# Altium PCB Jamali.PcbDoc
Units mm, origin at the board's own origin, x right, y up, seen from the top; angles counter-clockwise.
Board outline 152.4 x 101.6 mm, 2 copper layers (Top Layer, Bottom Layer); 45 components, 45 nets, 171 pads, 0 vias.
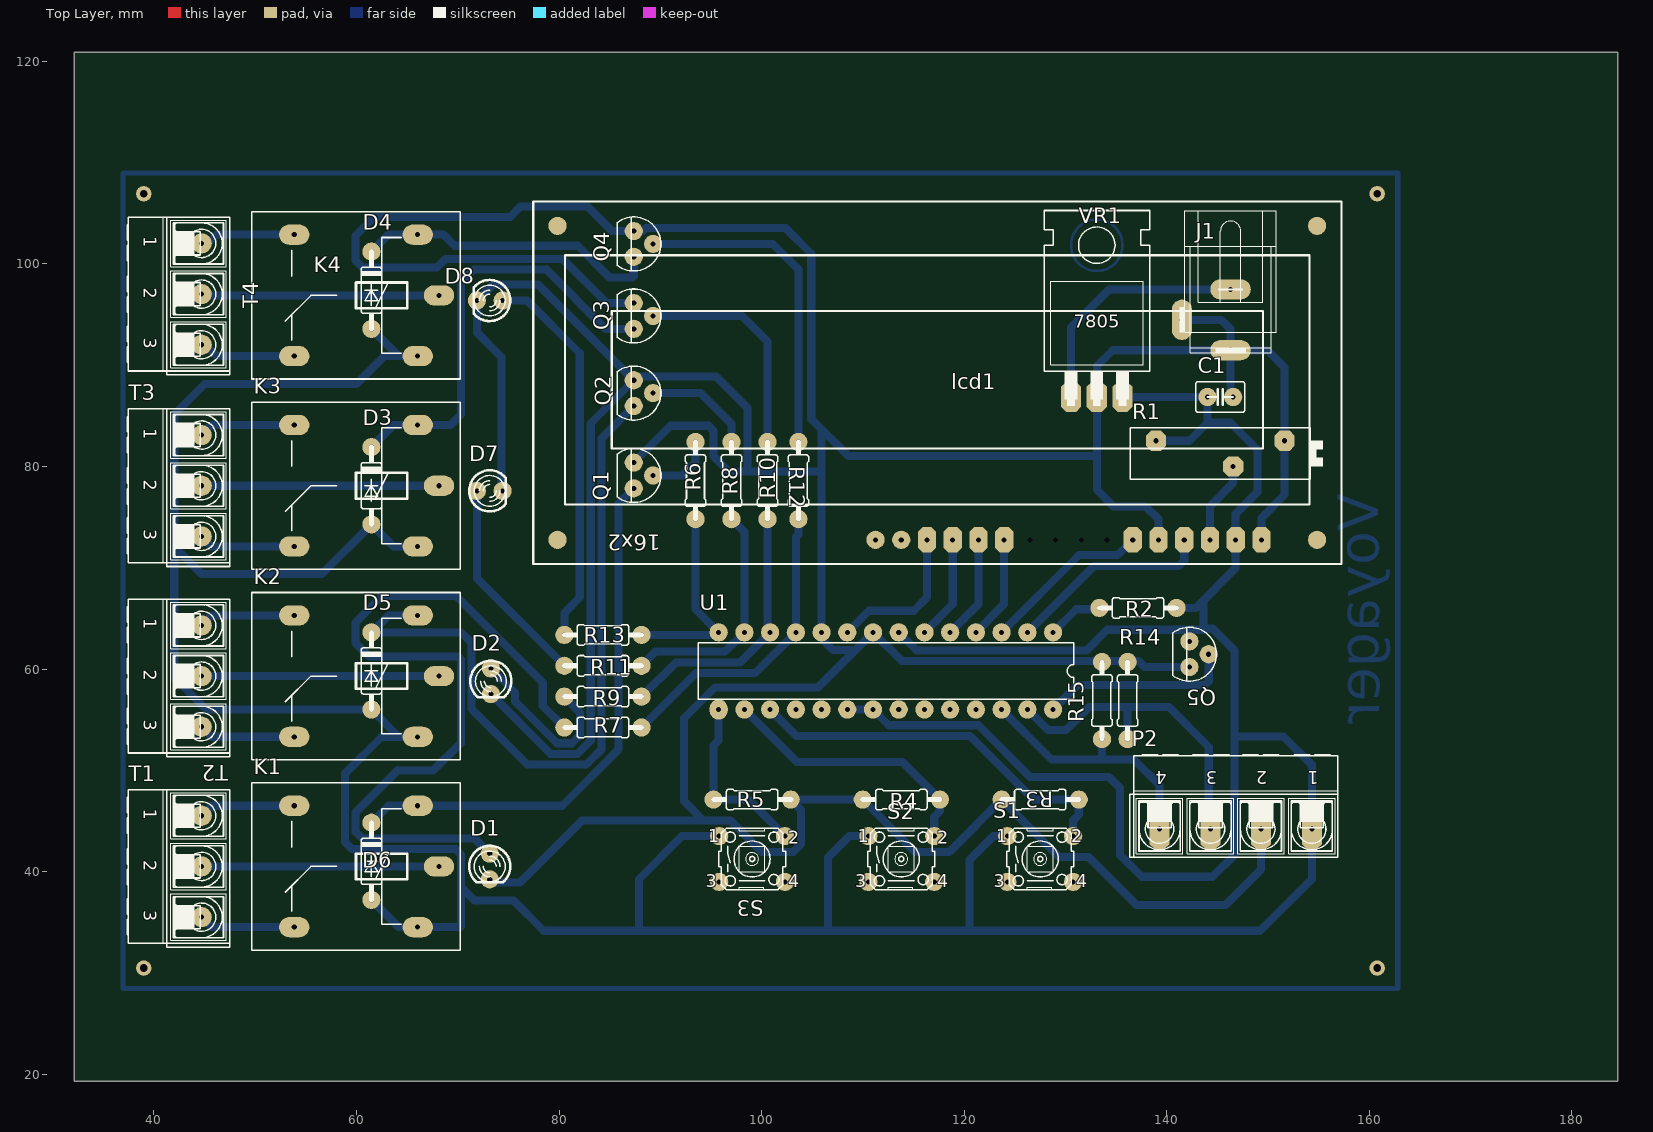
[diagram p0: Top Layer view]
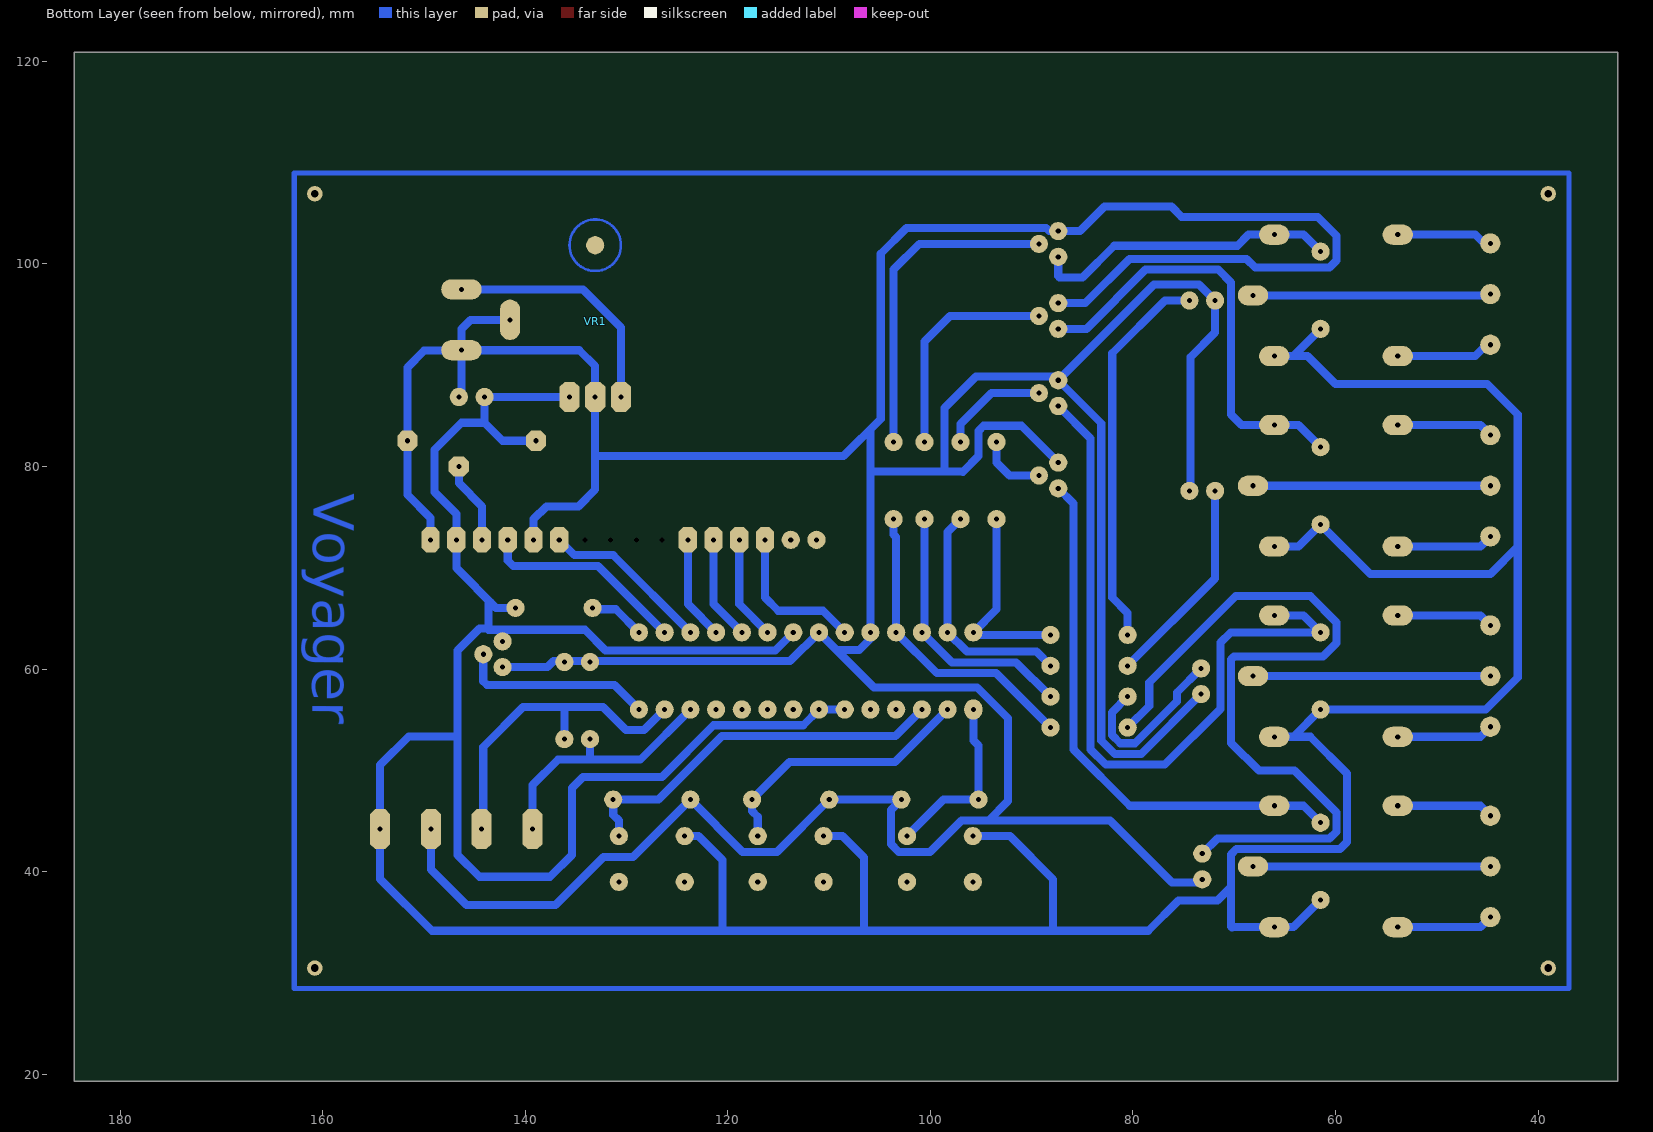
[diagram p1: Bottom Layer view, seen from below]

## Layer stack, top to bottom
Top Layer: signal copper 0.0356
Dielectric: dielectric 0.32, FR-4, Dk 4.8
Bottom Layer: signal copper 0.0356

## Board outline
32.131,19.304 184.531,19.304 184.531,120.904 32.131,120.904

## Design rules (kind name [scope] priority, off if disabled: settings)
Clearance [All] p1: gap=0.254
FabricationTestPointUsage TestPointUsage [All] p1: valid=0 allowmultiple=FALSE
FabricationTestpoint Testpoint [All] p1: side=3 testpointundercomponent=TRUE minsize=1.016 maxsize=2.54 preferedsize=1.524 minholesize=0 maxholesize=1.016 preferedholesize=0.813 testpointgrid=0.025 allowsidetop=TRUE allowsidebottom=TRUE usegrid=TRUE gridtolerance=0
PolygonConnect [All] p1: connectstyle=Relief reliefconductorwidth=0.254 reliefentries=4 polygonreliefangle="90 Angle"
RoutingLayers [All] p1: top layer_v5=FALSE bottom layer_v5=TRUE
RoutingVias [All] p1: holewidth=0.711 width=1.27 viastyle="Through Hole" minholewidth=0.711 minwidth=1.27 maxholewidth=0.711 maxwidth=1.27
SilkscreenOverComponentPads [All] p1: minsilkscreentomaskgap=0.254
SolderMaskExpansion [All] p1: expansion=0.102
Width [All] p1: maxlimit=0.8 minlimit=0.5 preferedwidth=0.8
24 further rules are at their usual default settings.

## Components (designator, comment, footprint, x,y, rotation, side; value= is the part's Value field where it differs from the comment)
C1 "Cap" C2.5-3 145.288,86.868 r0 top
D1 "LED0" LED3MM 73.152,40.513 r270 top
D2 "LED0" LED3MM 73.265,58.801 r270 top
D3 "Diode" DO35-7 61.468,78.105 r270 top
D4 "Diode" DO35-7 61.468,97.409 r270 top
D5 "Diode" DO35-7 61.468,59.817 r270 top
D6 "Diode" DO35-7 61.468,41.021 r270 top
D7 "LED0" LED3MM 73.152,77.597 r0 top
D8 "LED0" LED3MM 73.152,96.393 r180 top
J1 "" SPC4077 146.304,94.488 r270 top
K1 "Relay" ZF112 59.944,40.513 r180 top
K2 "Relay" ZF112 59.944,59.309 r180 top
K3 "Relay" ZF112 59.944,78.105 r180 top
K4 "Relay" ZF112 59.944,96.901 r180 top
lcd1 "LCD" TUXGR_16X2_R2 117.348,88.265 r180 top
P2 "Terminal 4" AK500/4-H 146.812,44.196 r180 top
Q1 "2N3904" TO92D 87.376,79.121 r270 top
Q2 "2N3904" TO92D 87.376,87.249 r270 top
Q3 "2N3904" TO92D 87.376,94.869 r270 top
Q4 "2N3904" TO92D 87.376,101.981 r270 top
Q5 "2N3904" TO92D 142.24,61.468 r270 top
R1 "" POT_2 145.288,81.28 r180 top
R2 "Res1" 0204/7 137.16,66.04 r0 top
R3 "Res2" 0204/7 127.508,47.117 r0 top
R4 "Res2" 0204/7 113.792,47.117 r0 top
R5 "Res2" 0204/7 99.06,47.117 r180 top
R6 "Res1" 0204/7 93.472,78.613 r90 top
R7 "Res1" 0204/7 84.328,54.229 r180 top
R8 "Res1" 0204/7 97.028,78.613 r90 top
R9 "Res1" 0204/7 84.328,57.277 r180 top
R10 "Res1" 0204/7 100.584,78.613 r90 top
R11 "Res1" 0204/7 84.328,60.325 r180 top
R12 "Res1" 0204/7 103.632,78.613 r90 top
R13 "Res1" 0204/7 84.328,63.373 r180 top
R14 "Res1" 0204/7 136.144,56.896 r270 top
R15 "Res1" 0204/7 133.604,56.896 r270 top
S1 "Button" B3F-10XX 127.508,41.25 r0 top
S2 "Button" B3F-10XX 113.792,41.25 r0 top
S3 "Button" B3F-10XX 99.06,41.25 r0 top
T1 "TERMINAL 3" AK500/3-H 44.704,40.513 r270 top
T2 "TERMINAL 3" AK500/3-H 44.704,59.309 r270 top
T3 "TERMINAL 3" AK500/3-H 44.704,78.105 r270 top
T4 "TERMINAL 3" AK500/3-H 44.704,97.028 r270 top
U1 "ATmega8-16PI" DIL28-3 112.268,59.817 r180 top
VR1 "7805_2" TO220H 133.096,97.028 r180 top

## Footprints (in the part's own frame and the unit in brackets; to place one, negate y for a bottom-side part, rotate by r counter-clockwise, add the part's x,y. Pads: shape width x height; smd on the part's side, far side on the other; paste and mask are expansions set on the pad)
0204/7 [mm]
  round 1.8 hole 0.5: 1(-3.81,0) 2(3.81,0)
  silkscreen extent -3.81,-1.02 3.81,1.02
AK500/3-H [mm]
  round 2 hole 0.5: 1(-5.004,0) 2(0,0) 3(5.004,0)
  silkscreen extent -7.59,-7.37 7.98,2.79
AK500/4-H [mm]
  oct 1.981x3.962 hole 0.5: 1(-7.518,0) 2(-2.489,0) 3(2.489,0) 4(7.518,0)
  silkscreen extent -10.08,-7.37 10.46,2.79
B3F-10XX [mm]
  round 1.8 hole 0.5: 1(-3.251,2.261) 2(3.251,2.261) 3(-3.251,-2.261) 4(3.251,-2.261)
  silkscreen extent -3.3,-3.05 3.3,3.05
C2.5-3 [mm]
  round 1.8 hole 0.5: 1(-1.27,0) 2(1.27,0)
  silkscreen extent -2.41,-1.52 2.41,1.52
DIL28-3 [mm]
  round 1.8 hole 0.5: 1(-16.51,-3.81) 2(-13.97,-3.81) 3(-11.43,-3.81) 4(-8.89,-3.81) 5(-6.35,-3.81) 6(-3.81,-3.81) 7(-1.27,-3.81) 8(1.27,-3.81) 9(3.81,-3.81) 10(6.35,-3.81) 11(8.89,-3.81) 12(11.43,-3.81) 13(13.97,-3.81) 14(16.51,-3.81) 16(13.97,3.81) 17(11.43,3.81) 18(8.89,3.81) 19(6.35,3.81) 20(3.81,3.81) 21(1.27,3.81) 22(-1.27,3.81) 23(-3.81,3.81) 24(-6.35,3.81) 25(-8.89,3.81) 26(-11.43,3.81) 27(-13.97,3.81) 28(-16.51,3.81)
  oval 1.8x2 hole 0.5: 15(16.51,3.81)
  silkscreen extent -18.54,-2.79 18.54,2.79
DO35-7 [mm]
  round 1.8 hole 0.5: 1(-3.81,0) 2(3.81,0)
  silkscreen extent -3.81,-1.02 3.81,1.02
LED3MM [mm]
  round 1.8 hole 0.5: 1(-1.27,0) 2(1.27,0)
  silkscreen extent -2.03,-2.03 1.57,2.03
POT_2 [mm]
  oct 2x2 hole 0.5: 1(-6.35,-1.27) 2(-1.27,1.27) 3(6.35,-1.27)
  silkscreen extent -10.16,-2.54 8.89,2.54
SPC4077 [mm]
  oval 4x2 hole 0.5: 1(0,-4.8)
  oval 2x4 hole 0.5: 2(3,0) 3(-3,0)
  silkscreen extent -10.75,-5.05 3.25,4.5
TO92D [mm]
  round 1.8 hole 0.5: B(0,1.905) C(1.27,0) E(-1.27,0)
  silkscreen extent -2.66,-1.65 2.66,2.67
TO220H [mm]
  oct 2x3 hole 0.5: 1(2.54,10.16) 2(0,10.16) 3(-2.54,10.16)
  round 1.8 smd far side: ""(0,-4.826)
  Bottom Layer circle w0.254: c0,-4.826 r2.54
  Bottom Layer circle w0.254: c0,-4.826 r2.54
  silkscreen extent -5.21,-8.25 5.21,11.05
TUXGR_16X2_R2 [mm]
  oct 1.8x2.5 hole 0.5: 1(-32,15.5) 2(-29.46,15.5) 3(-26.92,15.5) 4(-24.38,15.5) 5(-21.84,15.5) 6(-19.3,15.5) 11(-6.6,15.5) 12(-4.06,15.5) 13(-1.52,15.5) 14(1.02,15.5)
  round 0 hole 0.5: 7(-16.76,15.5) 8(-14.22,15.5) 9(-11.68,15.5) 10(-9.14,15.5)
  round 1.8 hole 0.5: 15(3.56,15.5) 16(6.1,15.5)
  round 1.8 smd: ""(-37.5,15.5) ""(-37.5,-15.5) ""(37.5,-15.5) ""(37.5,15.5)
  silkscreen extent -39.9,-17.9 39.9,17.9
ZF112 [mm]
  oval 3x2 hole 0.5: 1(-8.204,0) 2(6.096,5.994) 3(6.096,-5.994) 4(-6.096,5.994) 5(-6.096,-5.994)
  silkscreen extent -10.29,-8.26 10.29,8.26

## Part data
C1: "Capacitor"
D1 D2 D7 D8: "Typical INFRARED GaAs LED"
J1: library part Jack, "Low Voltage Power Supply Connector"
K1 K2 K3 K4: "SPDT Relay"
P2: "Header, 4-Pin"
Q1 Q2 Q3 Q4 Q5: "NPN General Purpose Amplifier"
R1: library part pot_2, "Potentiometer"
R2: library part Res2, "Resistor"
R3 R4 R5 R6 R7 R8 R9 R10 R11 R12 R13 R14 R15: "Resistor"
S1 S2 S3: "Switch"
U1: "8-Bit AVR Microcontroller with 8K Bytes of In-System Programmable Flash Memory"
VR1: "Voltage Regulator"

## Free pads (board coordinates)
  round 1.524 hole 0.762: 2(38.989,30.48) 3(38.989,106.934) 4(160.782,106.934) 5(160.782,30.48)

## Nets (pads, with @x,y where several pads share a name; then routed paths per layer and width w, separated by ;. In a path a pad name is that pad's centre, name@x,y a point inside that pad or via, vN(x,y) a via of type N, cw(c..) or ccw(c..) an arc to the next point about the centre after c; other vN are vias at no path point)
4: lcd1.11 U1.4 | length 10.3
  Bottom Layer w0.8: U1.4 123.948,66.417 lcd1.11
5: lcd1.12 U1.5 | length 10.3
  Bottom Layer w0.8: U1.5 121.408,66.417 lcd1.12
6: lcd1.13 U1.6 | length 10.3
  Bottom Layer w0.8: U1.6 118.868,66.417 lcd1.13
7: lcd1.14 U1.9 | length 15
  Bottom Layer w0.8: U1.9 110.59,65.759 115.027,65.759 116.328,67.06 lcd1.14
ADC: Q5.B U1.28 | length 19.2
  Bottom Layer w0.8: U1.28 131.188,58.417 143.761,58.417 144.145,58.801 Q5.B
B0: R6.1 R13.1 U1.14 | length 19.8
  Bottom Layer w0.8: R13.1 95.504,63.373 U1.14 93.472,65.913 R6.1
C3: P2.4 R15.2 U1.26 | length 25.1
  Bottom Layer w0.8: U1.26 128.651,51.054 136.779,51.054 139.294,48.539 P2.4 ; 133.477,51.054 133.604,51.181 R15.2
C4: P2.3 R14.2 U1.27 | length 32.5
  Bottom Layer w0.8: U1.27 128.27,53.975 130.048,53.975 132.334,56.261 140.208,56.261 144.145,52.324 P2.3@144.145,44.323 ; R14.2 136.144,56.261
COM1: K1.1 T1.2 | length 23.4
  Bottom Layer w0.8: T1.2 K1.1
COM2: K2.1 T2.2 | length 23.4
  Bottom Layer w0.8: T2.2 K2.1
COM3: K3.1 T3.2 | length 23.4
  Bottom Layer w0.8: T3.2 K3.1
COM4: K4.1 T4.2 | length 22.9
  Bottom Layer w0.8: T4.2@45.212,96.901 K4.1
D5: R7.1 R12.1 U1.11 | length 30.4
  Bottom Layer w0.8: R7.1 93.523,59.614 99.365,59.614 U1.11 103.378,73.025 103.632,73.279 R12.1
D6: R9.1 R10.1 U1.12 | length 26.6
  Bottom Layer w0.8: R9.1 91.529,60.668 97.879,60.668 U1.12 100.584,63.881 R10.1
D7: R8.1 R11.1 U1.13 | length 23.2
  Bottom Layer w0.8: R11.1 89.535,61.722 96.393,61.722 U1.13 98.298,73.533 R8.1
EN: lcd1.6 U1.3 | length 16.7
  Bottom Layer w0.8: U1.3 131.318,71.247 135.13,71.247 lcd1.6
GND: C1.2 D1.2 D2.2 D7.2 D8.2 J1.1 J1.2 lcd1.1 lcd1.5 P2.2 Q1.E Q2.E Q3.E Q4.E Q5.C R1.1 R3.1 R4.1 R5.1 R14.1 R15.1 U1.8 U1.10 VR1.2 | length 520.2
  Bottom Layer w0.8: D2.2 79.175,51.621 81.788,51.621 83.126,52.959 83.126,84.269 Q2.E Q2.E@87.02,88.875 ; D1.2@73.457,38.938 76.124,38.938 82.252,45.067 96.919,45.067 100.03,41.956 103.124,41.956 103.886,42.718 103.886,46.101 R5.1 R4.1 115.143,41.956 118.537,41.956 R3.1 129.366,41.449 132.287,41.449 137.033,36.703 145.796,36.703 149.301,40.208 P2.2 ; D7.2 74.295,77.724 74.295,90.805 71.882,93.218 D8.2 73.457,97.968 77.927,97.968 Q2.E@87.02,88.875 ; Q1.E 91.008,84.023 94.742,84.023 95.25,83.515 95.25,81.026 96.794,79.482 ; Q3.E 84.709,96.139 80.34,100.508 68.783,100.508 67.92,99.644 60.579,99.644 59.893,100.33 59.893,102.794 61.747,104.648 75.184,104.648 76.2,105.664 82.804,105.664 85.217,103.251 88.265,103.251 88.57,103.556 102.362,103.556 104.902,101.016 104.902,84.709 108.585,81.026 132.969,81.026 ; 94.234,45.067 92.329,46.972 92.329,55.143 95.377,58.191 105.562,58.191 U1.8 113.843,60.782 137.211,60.782 137.795,60.198 Q5.C ; 96.794,79.502 105.918,79.502 ; 98.806,79.502 98.603,79.705 98.603,85.776 95.504,88.875 87.376,88.875 Q2.E@87.02,88.875 ; U1.10@105.918,62.992 107.019,61.891 109.262,61.891 ; U1.10 105.918,83.581 105.974,83.637 ; 133.096,81.026 133.096,77.724 134.747,76.073 137.922,76.073 139.188,74.807 lcd1.5 ; 133.096,81.153 133.096,89.916 134.668,91.488 J1.2 ; J1.1 145.415,94.488 146.304,93.599 146.304,87.122 C1.2@146.685,86.741 ; J1.2@146.304,91.44 149.987,91.44 151.638,89.789 151.638,77.216 149.348,74.926 lcd1.1
NC1: K1.2 T1.3 | length 9.6
  Bottom Layer w0.8: T1.3 45.694,34.519 K1.2
NC2: K2.2 T2.3 | length 9.6
  Bottom Layer w0.8: T2.3 45.694,53.315 K2.2
NC3: K3.2 T3.3 | length 9.6
  Bottom Layer w0.8: T3.3 45.694,72.111 K3.2
NC4: K4.2 T4.3 | length 9
  Bottom Layer w0.8: T4.3@45.212,91.897 46.202,90.907 K4.2
NetD1_1: D1.1 R7.2 | length 79.1
  Bottom Layer w0.8: D1.1 71.658,43.277 60.579,43.277 59.914,43.942 59.914,45.842 64.054,49.982 67.564,49.982 70.302,52.72 70.302,60.963 70.026,61.239 61.214,61.239 59.893,62.56 59.893,64.618 62.484,67.208 69.85,67.208 78.383,58.676 78.383,56.364 R7.2
NetD2_1: D2.1 R9.2 | length 17.1
  Bottom Layer w0.8: D2.1 75.667,57.669 75.667,56.794 79.786,52.675 81.25,52.675 82.072,53.497 82.072,55.723 R9.2
NetD3_1: D3.1 K3.5 Q3.C | length 43.2
  Bottom Layer w0.8: D3.1 63.652,84.099 K3.5 69.266,84.099 70.307,85.14 70.307,98.171 71.577,99.441 78.74,99.441 84.582,93.599 Q3.C
NetD4_1: D4.1 K4.5 Q4.C | length 30.3
  Bottom Layer w0.8: D4.1 63.144,102.895 K4.5 68.58,102.895 69.672,101.803 81.839,101.803 84.963,98.679 87.249,98.679 87.376,98.806 Q4.C
NetD5_1: D5.1 K2.5 Q2.C | length 73.1
  Bottom Layer w0.8: K2.5 63.144,65.303 D5.1 70.34,63.627 71.356,62.611 71.356,56.067 76.856,50.567 82.677,50.567 84.18,52.07 84.18,82.783 Q2.C
NetD6_1: D6.1 K1.5 Q1.C | length 53.9
  Bottom Layer w0.8: D6.1 63.144,46.507 K1.5 80.314,46.507 85.877,52.07 85.877,76.352 Q1.C ; 85.814,52.133 85.877,52.197
NetD7_1: D7.1 R11.2 | length 20.8
  Bottom Layer w0.8: D7.1 71.882,68.961 R11.2
NetD8_1: D8.1 R13.2 | length 38.2
  Bottom Layer w0.8: D8.1 76.835,96.393 82.042,91.186 82.042,67.056 80.518,65.532 R13.2
NetJ1_3: J1.3 VR1.1 | length 24.2
  Bottom Layer w0.8: VR1.1 130.556,93.726 134.318,97.488 J1.3
Netlcd1_3: lcd1.3 R1.2 | length 8.2
  Bottom Layer w0.8: lcd1.3 144.268,76.069 146.558,78.359 R1.2
NetQ1_B: Q1.B R6.2 | length 6.7
  Bottom Layer w0.8: Q1.B 92.202,79.121 93.472,80.391 R6.2
NetQ2_B: Q2.B R8.2 | length 10.8
  Bottom Layer w0.8: Q2.B 93.98,87.249 97.028,84.201 R8.2
NetQ3_B: Q3.B R10.2 | length 22.3
  Bottom Layer w0.8: Q3.B 98.044,94.869 100.584,92.329 R10.2
NetQ4_B: Q4.B R12.2 | length 32.4
  Bottom Layer w0.8: Q4.B 101.092,101.981 103.632,99.441 R12.2
NetR2_1: R2.1 U1.1 | length 5.3
  Bottom Layer w0.8: U1.1 131.064,65.913 R2.1@133.096,65.913
NO1: K1.3 T1.1 | length 9.6
  Bottom Layer w0.8: T1.1 45.694,46.507 K1.3
NO2: K2.3 T2.1 | length 9.6
  Bottom Layer w0.8: T2.1 45.694,65.303 K2.3
NO3: K3.3 T3.1 | length 9.6
  Bottom Layer w0.8: T3.1 45.694,84.099 K3.3
NO4: K4.3 T4.1 | length 9
  Bottom Layer w0.8: T4.1@45.212,101.905 46.202,102.895 K4.3
RS: lcd1.4 U1.2 | length 20.5
  Bottom Layer w0.8: U1.2 132.804,70.193 141.186,70.193 141.732,70.739 141.732,72.761 lcd1.4
S1: R3.2 S1.2 U1.17 | length 38
  Bottom Layer w0.8: U1.17 103.446,53.399 120.566,53.399 126.848,47.117 R3.2 131.318,45.593 130.759,45.034 S1.2
S2: R4.2 S2.2 U1.16 | length 26.8
  Bottom Layer w0.8: U1.16 103.48,50.825 113.894,50.825 R4.2 117.602,45.974 117.043,45.415 S2.2
S3: R5.2 S3.2 U1.15 | length 17.7
  Bottom Layer w0.8: U1.15 95.758,52.959 95.25,52.451 R5.2 98.704,47.117 S3.2
VCC: C1.1 D3.2 D4.2 D5.2 D6.2 K1.4 K2.4 K3.4 K4.4 lcd1.2 P2.1 Q5.E R1.3 R2.2 S1.1 S2.1 S3.1 U1.7 U1.20 U1.21 VR1.3 | length 451.6
  Bottom Layer w0.8: D6.2 64.16,34.519 70.256,34.519 ; D4.2 64.16,90.907 ; 64.16,53.315 D5.2 45.161,56.007 41.996,59.172 41.996,72.101 ; K2.4 62.484,53.315 58.86,49.691 58.86,42.926 59.563,42.223 69.791,42.223 70.307,41.707 70.307,34.57 70.231,34.494 ; K3.4 63.652,72.111 D3.2 56.566,69.393 44.704,69.393 41.996,72.101 ; K4.4 64.16,90.907 ; 70.307,38.481 71.632,37.156 75.493,37.156 78.486,34.163 149.225,34.163 154.33,39.268 154.33,50.521 151.511,53.34 146.685,53.34 ; 87.884,34.519 87.884,39.243 92.151,43.51 S3.1 ; 106.553,34.519 106.553,41.402 108.661,43.51 S2.1 ; U1.20 U1.21 112.552,54.453 121.417,54.453 126.517,49.352 134.29,49.352 135.382,48.26 135.382,41.656 137.541,39.497 144.526,39.497 146.685,41.656 146.685,61.849 144.526,64.008 143.637,64.008 ; U1.7 115.316,61.849 132.08,61.849 134.112,63.881 143.637,63.881 143.637,66.411 143.442,66.607 ; 120.523,34.519 120.523,41.148 122.885,43.51 S1.1 ; VR1.3 C1.1 144.018,84.328 ; R1.3 142.24,82.55 144.018,84.328 ; R2.2 142.875,66.04 146.808,69.973 146.808,75.307 148.971,77.47 148.971,81.661 146.304,84.328 144.018,84.328 ; 142.113,63.881 142.24,63.754 Q5.E ; P2.1@154.178,44.348 P2.1 ; 41.996,72.101 41.996,85.125 45.009,88.138 59.994,88.138 62.763,90.907 64.16,90.907
pads on no net: lcd1. lcd1.7 lcd1.8 lcd1.9 lcd1.10 lcd1.15 lcd1.16 S1.3 S1.4 S2.3 S2.4 S3.3 S3.4 U1.18 U1.19 U1.22 U1.23 U1.24 U1.25 VR1.
copper on no net: | length 412.8
  Bottom Layer w0.5: 36.957,28.448 162.814,28.448 162.814,108.966 36.957,108.966 36.957,28.448

## Other copper
Bottom Layer:
  text "Voyager" at 160.909,77.343 h4 r90.32

## Text inside footprints (layer, text, board x,y; h text height)
lcd1: Top Overlay "16x2" at 90.043,73.279 h1.54 r180
P2: Top Overlay "4" at 139.979,49.911 h1.27 r180; Top Overlay "3" at 145.009,49.911 h1.27 r180; Top Overlay "2" at 149.911,49.911 h1.27 r180; Top Overlay "1" at 155.016,49.911 h1.27 r180
S1: Top Overlay "4" at 131.064,38.456 h1.27; Top Overlay "3" at 122.936,38.456 h1.27; Top Overlay "2" at 130.556,42.926 h1.27; Top Overlay "1" at 123.19,42.901 h1.27
S2: Top Overlay "4" at 117.348,38.456 h1.27; Top Overlay "3" at 109.22,38.456 h1.27; Top Overlay "2" at 117.348,42.774 h1.27; Top Overlay "1" at 109.474,42.901 h1.27
S3: Top Overlay "4" at 102.616,38.456 h1.27; Top Overlay "3" at 94.488,38.456 h1.27; Top Overlay "2" at 102.616,42.774 h1.27; Top Overlay "1" at 94.742,42.901 h1.27
T1: Top Overlay "3" at 38.989,36.195 h1.27 r270; Top Overlay "2" at 38.989,41.123 h1.27 r270; Top Overlay "1" at 38.989,46.203 h1.27 r270
T2: Top Overlay "3" at 38.989,54.991 h1.27 r270; Top Overlay "2" at 38.989,59.919 h1.27 r270; Top Overlay "1" at 38.989,64.999 h1.27 r270
T3: Top Overlay "3" at 38.989,73.787 h1.27 r270; Top Overlay "2" at 38.989,78.715 h1.27 r270; Top Overlay "1" at 38.989,83.795 h1.27 r270
T4: Top Overlay "3" at 38.989,92.71 h1.27 r270; Top Overlay "2" at 38.989,97.638 h1.27 r270; Top Overlay "1" at 38.989,102.718 h1.27 r270
VR1: Top Overlay "7805" at 130.81,93.726 h1.29